# EAGLE board Project-PowerSwitch002 (EAGLE 7.3.0)

Size 60.94 x 100 mm. Coordinates in mm from the lower left corner, seen from the top.
Outline: 0,0 60.94,0 60.94,100 0,100 0,0
Copper layers (1*16): Top 0.035mm / dielectric 1.5mm / Bottom 0.035mm
Design rules "default": minimum track width 10mil, minimum drill 24mil, track to track 8mil, track to pad 8mil, pad to pad 8mil, via to via 8mil, smd to smd 8mil, copper to edge 40mil, drill to drill 8mil, minimum pad ring 10mil, minimum via ring 8mil, stop-mask expansion 4mil, vias tented up to drill 0mil, thermal gap 10mil

## Footprints (pad centres in the part's own frame; a part is rotated, then mirrored left to right if it is on the bottom)
5-5 = smd 5.08 x 5.08: P$1 0,0
PANASONIC_C = smd 2.6 x 1.4: + 2.05,0; - -2.05,0
PANASONIC_D = smd 3 x 1.4: + 2.4,0; - -2.4,0
C0603K = smd 1.05 x 1.08: 1 -0.875,0; 2 0.875,0
C0603 = smd 1.1 x 1: 1 -0.85,0; 2 0.85,0
D2PAK = smd 2.08 x 3.81: P$1 -2.54,-6.985; P$2 2.54,-6.985 | smd 11.5 x 8.89: P$3 0,4.445
SMB = smd 2.4 x 2.4: A 2.2,0; C -2.2,0
SMD-6,1X2,6 = smd 1.96 x 3.15: 1 -2.45,0; 2 2.45,0
2,8-PAD = drill 2.8 pad 5.334: B2,8 0,0
SO14W = smd 0.6 x 2.2: 1 -3.81,-4.6; 2 -2.54,-4.6; 3 -1.27,-4.6; 4 0,-4.6; 5 1.27,-4.6; 6 2.54,-4.6; 7 3.81,-4.6; 8 3.81,4.6; 9 2.54,4.6; 10 1.27,4.6; 11 0,4.6; 12 -1.27,4.6; 13 -2.54,4.6; 14 -3.81,4.6
TO220-52 = drill 1.6 pad 2.5: 1 -5.08,-30.48; 2 -2.54,-27.94; 3 0,-30.48; 4 2.54,-27.94; 5 5.08,-30.48 | hole 4.05: 0,-4
SO16 = smd 0.66 x 2.032: 1 -4.445,-3.073; 2 -3.175,-3.073; 3 -1.905,-3.073; 4 -0.635,-3.073; 5 0.635,-3.073; 6 1.905,-3.073; 7 3.175,-3.073; 8 4.445,-3.073; 9 4.445,3.073; 10 3.175,3.073; 11 1.905,3.073; 12 0.635,3.073; 13 -0.635,3.073; 14 -1.905,3.073; 15 -3.175,3.073; 16 -4.445,3.073
TO252-51 = smd 0.8 x 1.6: IN -1.14,-4.8; IS 1.14,-4.8; OUT1 -2.28,-4.8; OUT2 2.28,-4.8 | smd 5.4 x 6.2: TAB 0,2.5
JP1 = drill 0.914 long: 1 0,-1.27; 2 0,1.27
JP2 = drill 0.914 long: 1 -2.54,0; 2 0,0; 3 2.54,0
R0805 = smd 1.3 x 1.5: 1 -0.95,0; 2 0.95,0
POWER-CHOKE_WE-TPC = smd 6.3 x 2.2: 1 0,2.05; 2 0,-2.05
CHIPLED_0805 = smd 1.2 x 1.2: A 0,-1.05; C 0,1.05
HC49U-V@1 = drill 0.813: 1 -2.413,0; 2 2.413,0
M0805 = smd 1.3 x 1.6: 1 -0.95,0; 2 0.95,0
RJ10 = drill 0.9: P$1 -1.905,6.55; P$2 -0.953,9.09; P$3 0.953,6.55; P$4 1.905,9.09 | hole 1.59: -3.81,0.2; 3.81,0.2
SJ = smd 1.168 x 1.6: 1 -0.762,0; 2 0.762,0
ML6 = drill 0.914 octagon: 1 -2.54,-1.27; 2 -2.54,1.27; 3 0,-1.27; 4 0,1.27; 5 2.54,-1.27; 6 2.54,1.27
ML10 = drill 0.914 octagon: 1 -5.08,-1.27; 2 -5.08,1.27; 3 -2.54,-1.27; 4 -2.54,1.27; 5 0,-1.27; 6 0,1.27; 7 2.54,-1.27; 8 2.54,1.27; 9 5.08,-1.27; 10 5.08,1.27
SOT23 = smd 1 x 1.4: 1 -0.95,-1.1; 2 0.95,-1.1; 3 0,1.1
F/CM12P = drill 1.016 pad 2.54 octagon: + 3.81,0; - -3.81,0
SOIC127P600X175-8N = smd 1.473 x 0.559: 1 -2.718,1.905; 2 -2.718,0.635; 3 -2.718,-0.635; 4 -2.718,-1.905; 5 2.718,-1.905; 6 2.718,-0.635; 7 2.718,0.635; 8 2.718,1.905
TQFP32-08 = smd 1.27 x 0.559: 1 -4.293,2.8; 2 -4.293,2; 3 -4.293,1.2; 4 -4.293,0.4; 5 -4.293,-0.4; 6 -4.293,-1.2; 7 -4.293,-2; 8 -4.293,-2.8; 17 4.293,-2.8; 18 4.293,-2; 19 4.293,-1.2; 20 4.293,-0.4; 21 4.293,0.4; 22 4.293,1.2; 23 4.293,2; 24 4.293,2.8 | smd 0.559 x 1.27: 9 -2.8,-4.293; 10 -2,-4.293; 11 -1.2,-4.293; 12 -0.4,-4.293; 13 0.4,-4.293; 14 1.2,-4.293; 15 2,-4.293; 16 2.8,-4.293; 25 2.8,4.293; 26 2,4.293; 27 1.2,4.293; 28 0.4,4.293; 29 -0.4,4.293; 30 -1.2,4.293; 31 -2,4.293; 32 -2.8,4.293

## Placement (x,y rotation side)
12IN+  WIREPADSMD5-5  [5-5]  57.15,69.85 0 top
12IN-  WIREPADSMD5-5  [5-5]  57.15,76.2 0 top
12OUT+  WIREPADSMD5-5  [5-5]  57.15,38.1 0 top
12OUT-  WIREPADSMD5-5  [5-5]  -58.42,64.77 0 top  (outside the outline)
24IN+  WIREPADSMD5-5  [5-5]  57.15,82.55 0 top
24IN-  WIREPADSMD5-5  [5-5]  57.15,88.9 0 top
ACTU+  WIREPADSMD5-5  [5-5]  57.15,44.45 0 top
ACTU-  WIREPADSMD5-5  [5-5]  57.15,63.5 0 top
C3  VF 22/35 P-C  [PANASONIC_C]  -102.87,53.34 0 top  (outside the outline)
C4  VF 220/16 K-D8  [PANASONIC_D]  -88.9,82.55 0 top  (outside the outline)
C5  100n  [C0603K]  -22.86,123.19 0 top  (outside the outline)
C10  22p  [C0603K]  -72.39,123.19 0 top  (outside the outline)
C11  22p  [C0603K]  -76.2,123.19 0 top  (outside the outline)
C12  100n  [C0603K]  -27.94,123.19 0 top  (outside the outline)
C13  100n  [C0603K]  -33.02,123.19 0 top  (outside the outline)
C14  100n  [C0603K]  -38.1,123.19 0 top  (outside the outline)
C16  100n  [C0603K]  -43.18,123.19 0 top  (outside the outline)
C18  100n  [C0603K]  -48.26,123.19 0 top  (outside the outline)
C19  100n  [C0603K]  -53.34,123.19 0 top  (outside the outline)
C20  100n  [C0603K]  -58.42,123.19 0 top  (outside the outline)
C21  100n  [C0603K]  -63.5,123.19 0 top  (outside the outline)
C24  100n  [C0603]  -17.78,123.19 0 top  (outside the outline)
C25  100n  [C0603K]  -68.58,123.19 0 top  (outside the outline)
D1  SFS1602G  [D2PAK]  -59.69,10.16 0 top  (outside the outline)
D3  MBRS140  [SMB]  -50.8,64.77 0 top  (outside the outline)
EXT+  WIREPADSMD5-5  [5-5]  48.26,38.1 0 top
EXT-  WIREPADSMD5-5  [5-5]  -96.52,90.17 0 top  (outside the outline)
F2-0.5A  SMD-MICRO-FUSE  [SMD-6,1X2,6]  -78.74,64.77 0 top  (outside the outline)
H5  MOUNT-PAD-ROUND2.8  [2,8-PAD]  -16.51,82.55 0 top  (outside the outline)
H6  MOUNT-PAD-ROUND2.8  [2,8-PAD]  -24.13,82.55 0 top  (outside the outline)
H7  MOUNT-PAD-ROUND2.8  [2,8-PAD]  -31.75,82.55 0 top  (outside the outline)
H8  MOUNT-PAD-ROUND2.8  [2,8-PAD]  -39.37,82.55 0 top  (outside the outline)
IC3  LM2574M-5.0  [SO14W]  -45.72,54.61 0 top  (outside the outline)
IC4  BTS555E3146  [TO220-52]  52.07,33.02 0 top
IC7  MAX202  [SO16]  -19.05,66.04 0 top  (outside the outline)
IC10  BTS6133  [TO252-51]  -88.9,6.35 0 top  (outside the outline)
IC11  BTS6133  [TO252-51]  -99.06,6.35 0 top  (outside the outline)
IC12  BTS6133  [TO252-51]  -109.22,6.35 0 top  (outside the outline)
IC15  BTS6133  [TO252-51]  -19.05,40.64 0 top  (outside the outline)
JP1  JP_CAN  [JP1]  -40.64,64.77 0 top  (outside the outline)
JP2  [JP2]  -97.79,82.55 0 top  (outside the outline)
JP3  [JP2]  -106.68,82.55 0 top  (outside the outline)
JP4  [JP2]  -17.78,90.17 0 top  (outside the outline)
JP5  [JP2]  -26.67,90.17 0 top  (outside the outline)
JP6  [JP2]  -35.56,90.17 0 top  (outside the outline)
JP7  [JP2]  -44.45,90.17 0 top  (outside the outline)
JP9  [JP1]  -74.93,116.84 0 top  (outside the outline)
KICK+  WIREPADSMD5-5  [5-5]  -105.41,90.17 0 top  (outside the outline)
KICK-  WIREPADSMD5-5  [5-5]  57.15,95.25 0 top
L1  10µH  [R0805]  -67.31,104.14 0 top  (outside the outline)
L3  WE-TPC 2811 10uH  [POWER-CHOKE_WE-TPC]  -33.02,54.61 0 top  (outside the outline)
LED1  [CHIPLED_0805]  -80.01,115.57 0 top  (outside the outline)
LED2  [CHIPLED_0805]  -85.09,115.57 0 top  (outside the outline)
LED3  [CHIPLED_0805]  -90.17,115.57 0 top  (outside the outline)
LED4  [CHIPLED_0805]  -95.25,115.57 0 top  (outside the outline)
LED5  [CHIPLED_0805]  -100.33,115.57 0 top  (outside the outline)
LED6  [CHIPLED_0805]  -105.41,115.57 0 top  (outside the outline)
MOT1+  WIREPADSMD5-5  [5-5]  -96.52,73.66 0 top  (outside the outline)
MOT1-  WIREPADSMD5-5  [5-5]  57.15,50.8 0 top
MOT2+  WIREPADSMD5-5  [5-5]  -105.41,73.66 0 top  (outside the outline)
MOT2-  WIREPADSMD5-5  [5-5]  57.15,57.15 0 top
Q1  16Mhz  [HC49U-V@1]  -90.17,53.34 0 top  (outside the outline)
R1  10k  [R0805]  -44.45,116.84 0 top  (outside the outline)
R2  20k  [R0805]  -49.53,116.84 0 top  (outside the outline)
R3  100k  [R0805]  -73.66,104.14 0 top  (outside the outline)
R4  150  [R0805]  -34.29,116.84 0 top  (outside the outline)
R5  4k7  [R0805]  -54.61,116.84 0 top  (outside the outline)
R6  120  [M0805]  -69.85,116.84 0 top  (outside the outline)
R7  150  [R0805]  -39.37,116.84 0 top  (outside the outline)
R8  20k  [R0805]  -59.69,116.84 0 top  (outside the outline)
R9  20k  [R0805]  -64.77,116.84 0 top  (outside the outline)
R10  100k  [R0805]  -80.01,104.14 0 top  (outside the outline)
R11  100k  [R0805]  -86.36,104.14 0 top  (outside the outline)
R12  150  [R0805]  -92.71,104.14 0 top  (outside the outline)
R13  1k  [R0805]  -99.06,104.14 0 top  (outside the outline)
R14  1k  [R0805]  -105.41,104.14 0 top  (outside the outline)
R15  10k  [R0805]  -111.76,104.14 0 top  (outside the outline)
R16  10k  [R0805]  -16.51,110.49 0 top  (outside the outline)
R17  10k  [R0805]  -22.86,110.49 0 top  (outside the outline)
R18  150  [R0805]  -29.21,110.49 0 top  (outside the outline)
R19  1k  [R0805]  -35.56,110.49 0 top  (outside the outline)
R20  1k  [R0805]  -41.91,110.49 0 top  (outside the outline)
R21  1k  [R0805]  -48.26,110.49 0 top  (outside the outline)
R22  10k  [R0805]  -54.61,110.49 0 top  (outside the outline)
R23  10k  [R0805]  -60.96,110.49 0 top  (outside the outline)
R24  150  [R0805]  69.85,97.79 0 top  (outside the outline)
R25  150  [R0805]  -73.66,110.49 0 top  (outside the outline)
R26  150  [R0805]  -80.01,110.49 0 top  (outside the outline)
R27  150  [R0805]  -86.36,110.49 0 top  (outside the outline)
R28  560  [R0805]  -92.71,110.49 0 top  (outside the outline)
R29  150  [R0805]  -99.06,110.49 0 top  (outside the outline)
R30  100k 0.1%  [R0805]  -30.48,97.79 0 top  (outside the outline)
R31  1k  [R0805]  -105.41,110.49 0 top  (outside the outline)
R35  220k 0.1%  [R0805]  -41.91,97.79 0 top  (outside the outline)
R36  30k 0.1%  [R0805]  -109.22,97.79 0 top  (outside the outline)
R37  300k 0.1%  [R0805]  -53.34,97.79 0 top  (outside the outline)
R38  30k 0.1%  [R0805]  -20.32,104.14 0 top  (outside the outline)
R39  300k 0.1%  [R0805]  -64.77,97.79 0 top  (outside the outline)
R40  30k 0.1%  [R0805]  -30.48,104.14 0 top  (outside the outline)
R41  300k 0.1%  [R0805]  -76.2,97.79 0 top  (outside the outline)
R42  20k 0.1%  [R0805]  -40.64,104.14 0 top  (outside the outline)
R43  20k 0.1%  [R0805]  -50.8,104.14 0 top  (outside the outline)
R44  20k 0.1%  [R0805]  -60.96,104.14 0 top  (outside the outline)
R45  910k 0.1%  [R0805]  -87.63,97.79 0 top  (outside the outline)
R46  240k 0.1%  [R0805]  -99.06,97.79 0 top  (outside the outline)
R47  10k  [R0805]  -111.76,110.49 0 top  (outside the outline)
R48  10k  [R0805]  -16.51,116.84 0 top  (outside the outline)
R49  10k  [R0805]  -22.86,116.84 0 top  (outside the outline)
R50  10k  [R0805]  -29.21,116.84 0 top  (outside the outline)
RJ_1  RJ10  [RJ10]  35.56,12.7 0 top
RJ_2  RJ10  [RJ10]  24.13,12.7 0 top
SJ2  [SJ]  -80.01,121.92 0 top  (outside the outline)
SV1  [ML6]  8.89,21.59 0 top
SV2  SchalterBox  [ML10]  30.48,39.37 0 top
SV3  ISP  [ML6]  8.89,33.02 0 top
SV4  extraSchalter  [ML10]  30.48,29.21 0 top
T1  BC847  [SOT23]  -59.69,74.93 0 top  (outside the outline)
T2  BC849  [SOT23]  -67.31,74.93 0 top  (outside the outline)
T5  BC849  [SOT23]  -74.93,74.93 0 top  (outside the outline)
T6  BC849  [SOT23]  -82.55,74.93 0 top  (outside the outline)
T7  BC849  [SOT23]  -90.17,74.93 0 top  (outside the outline)
TDB-05  F/CM12P  [F/CM12P]  8.89,8.89 0 top
U$1  MCP2551-I/SN  [SOIC127P600X175-8N]  -67.31,54.61 0 top  (outside the outline)
U$2  ATMEGA64M1  [TQFP32-08]  29.21,67.31 0 top
VR6  TL431_SOT23  [SOT23]  -93.98,64.77 0 top  (outside the outline)
VR7  TL431_SOT23  [SOT23]  -107.95,64.77 0 top  (outside the outline)
VR8  TL431_SOT23  [SOT23]  -24.13,74.93 0 top  (outside the outline)
VR9  TL431_SOT23  [SOT23]  -38.1,74.93 0 top  (outside the outline)
VR10  TL431_SOT23  [SOT23]  -52.07,74.93 0 top  (outside the outline)

## Library data of the parts
12IN+ 12IN- 12OUT+ 12OUT- 24IN+ 24IN- ACTU+ ACTU- EXT+ EXT- KICK+ KICK- MOT1+ MOT1- MOT2+ MOT2- = mywirepad
C3-C5 C10-C14 C16 C18-C21 C24 C25 L3 R1-R31 R35-R50 = rcl
D1 RJ_1 RJ_2 = ownParts
D3 = diode
F2-0.5A = f-lf-omniblok-s
H5-H8 = holes
IC3 = linear
IC4 = infineon; OC_FARNELL: unknown; OC_NEWARK: unknown
IC7 = maxim; MPN: MAX3232CSE; OC_FARNELL: 9725490; OC_NEWARK: 90C2890
IC10-IC12 IC15 = BTS443P
JP1-JP7 JP9 SJ2 = jumper
L1 = myrcl
LED1-LED6 = led
Q1 = crystal
SV1-SV4 = con-ml; OC_FARNELL: unknown; OC_NEWARK: unknown
T1 T2 T5-T7 = transistor
TDB-05 = buzzer; OC_FARNELL: unknown; OC_NEWARK: unknown
U$1 = Microchip-MCP2551-I_SN; MPN: MCP2551-I/SN; OC_FARNELL: 9758569; OC_NEWARK: 69K7604; PACKAGE: SOIC-8; SUPPLIER: Microchip
U$2 = atmega16m1-32m1-64m1
VR6-VR10 = 1_USER

## Nets
12V: D1.P$2 IC10.OUT1 IC10.OUT2
12VIN: 12IN+.P$1 IC10.TAB R3.1 R28.1 R35.2
12VOUT: 12OUT+.P$1 D1.P$3 F2-0.5A.1 R16.1
24VIN: 24IN+.P$1 IC4.3 IC11.TAB IC12.TAB R11.2 R37.2 R39.2 R41.2
+5V: C4.+ C5.2 C12.2 C24.2 C25.1 IC3.3 IC7.16 L1.2 L3.2 R1.2 R18.2 SJ2.1 SV2.9 SV2.10 SV3.2 SV4.9 SV4.10 T2.3 T5.3 T6.3 T7.3 TDB-05.+ U$1.3 U$2.4
ADC2: R9.2 R11.1 U$2.13
ADC3: IC10.IS R13.2 U$2.14
ADC5: IC12.IS R14.2 U$2.16
ADC6: IC4.4 R20.2 U$2.26
ADC7: IC15.IS R21.2 U$2.27
ADC8: R2.2 R3.2 U$2.17
ADC9: R8.2 R10.2 U$2.18
ADC10: IC11.IS R19.2 U$2.22
AKTUATOR: ACTU+.P$1 IC11.OUT1 IC11.OUT2 R17.1
CANH: R6.1 RJ_1.P$3 RJ_2.P$3 U$1.7
CANL: JP1.2 RJ_1.P$2 RJ_2.P$2 U$1.6
CS: U$2.32
EXT: D1.P$1 IC15.OUT1 IC15.OUT2
EXTIN: EXT+.P$1 IC15.TAB R10.1 R45.2
GND: 12IN-.P$1 12OUT-.P$1 24IN-.P$1 ACTU-.P$1 C3.- C4.- C5.1 C10.1 C11.1 C12.1 C13.1 C14.1 C16.2 C20.2 C21.2 C24.1 C25.2 D3.A EXT-.P$1 H5.B2,8 H6.B2,8 H7.B2,8 H8.B2,8 IC3.4 IC3.5 IC3.6 IC7.8 IC7.11 IC7.15 JP2.3 JP3.3 JP4.3 JP5.3 KICK-.P$1 LED1.C LED2.C LED3.C LED4.C LED5.C LED6.C MOT1-.P$1 MOT2-.P$1 R2.1 R8.1 R9.1 R13.1 R14.1 R19.1 R20.1 R21.1 R30.1 R31.1 R42.1 R43.1 R44.1 R46.1 RJ_1.P$4 RJ_2.P$4 SV1.5 SV2.1 SV2.2 SV3.6 SV4.1 SV4.2 T1.2 U$1.2 U$2.5 U$2.20 VR10.3
ICLED_AKT: R4.1 R25.1 T6.2 U$2.30
ICLED_GRUEN: R12.1 R27.1 T7.2 U$2.28
ICLED_KICK: R24.1 R29.1 T2.2 U$2.24
ICLED_ROT: R7.1 R26.1 T5.2 U$2.23
KICKER: IC12.OUT1 IC12.OUT2 KICK+.P$1 R23.1
LED_1: SV4.5
LED_2: SV4.3
LED_GELB: R4.2 SV2.5
LED_GRUEN: R12.2 SV2.7
LED_KICK: R24.2 SV4.7
LED_ROT: R7.2 SV2.3
MISO: SV3.1 U$2.1
MOSI: JP7.1 SV3.4
MOTION: IC4.1 IC4.5 MOT1+.P$1 MOT2+.P$1 R15.1
N$1: R5.2 T1.1
N$2: RJ_1.P$1 RJ_2.P$1 SJ2.2
N$3: IC15.IN R22.2
N$4: R23.2 T2.1
N$5: LED6.A R29.2
N$6: R31.2 U$1.8
N$7: JP1.1 R6.2
N$8: LED1.A R25.2
N$9: LED2.A R26.2
N$10: C10.2 Q1.2 U$2.11
N$11: C11.2 Q1.1 U$2.10
N$12: JP2.2 VR7.3
N$13: C14.2 U$2.21
N$14: C16.1 L1.1 U$2.19
N$15: C18.2 IC7.1
N$16: JP6.2 U$2.12
N$17: JP7.2 U$2.2
N$18: C19.2 IC7.4
N$19: JP4.2 VR9.3
N$20: T1.3 TDB-05.-
N$21: LED3.A R27.2
N$22: C3.+ F2-0.5A.2 IC3.10
N$23: JP3.2 VR8.3
N$24: LED4.A R28.2
N$25: JP5.2 R22.1 VR6.3
N$28: IC10.IN R50.2
N$33: R30.2 R35.1 VR6.2 VR10.1
N$35: C18.1 IC7.3
N$36: C19.1 IC7.5
N$37: C20.1 IC7.2
N$38: C21.1 IC7.6
N$39: R49.1 VR7.1
N$40: IC7.13 SV1.3
N$41: IC7.7 SV1.1
N$42: R36.2 R37.1 VR7.2
N$43: IC12.IN R47.2
N$44: R38.2 R39.1 VR8.2
N$45: R40.2 R41.1 VR9.2
N$46: IC4.2 R48.2
N$47: R38.1 R42.2
N$48: R40.1 R43.2
N$49: R36.1 R44.2
N$50: R45.1 R46.2 VR10.2
N$51: R47.1 VR8.1
N$52: R48.1 VR9.1
N$53: IC11.IN R49.2
N$54: R50.1 VR6.1
N$64: D3.C IC3.12 L3.1
N$102: R16.2 T5.1
N$104: R17.2 T6.1
N$106: R15.2 T7.1
N$108: LED5.A R18.1
RESET: SV3.5
RST: C13.2 R1.1 U$2.31
RXCAN: U$1.4 U$2.7
RXD: IC7.12 JP6.3
SCK: JP6.1 SV3.3
SPEAKER: R5.1 U$2.29
SW_1: SV4.6 U$2.3
SW_2: SV4.4
SW_12V: JP5.1 SV2.4
SW_AKT: JP2.1 JP9.2 SV2.6 U$2.8
SW_KICK: JP3.1 JP9.1 SV4.8 U$2.25
SW_MOT: JP4.1 SV2.8 U$2.9
TXCAN: U$1.1 U$2.6
TXD: IC7.10 JP7.3

## Tracks (layer width: path | path; a pad name or v marks a point on that pad's centre or on a via)
12V  (2 unrouted)
12VIN  (4 unrouted)
12VOUT  (3 unrouted)
24VIN  (7 unrouted)
+5V  (23 unrouted)
ADC2  (2 unrouted)
ADC3  (2 unrouted)
ADC5  (2 unrouted)
ADC6  (2 unrouted)
ADC7  (2 unrouted)
ADC8  (2 unrouted)
ADC9  (2 unrouted)
ADC10  (2 unrouted)
AKTUATOR  (3 unrouted)
CANH  (3 unrouted)
CANL  (3 unrouted)
EXT  (2 unrouted)
EXTIN  (3 unrouted)
GND  (68 unrouted)
ICLED_AKT  (3 unrouted)
ICLED_GRUEN  (3 unrouted)
ICLED_KICK  (3 unrouted)
ICLED_ROT  (3 unrouted)
KICKER  (3 unrouted)
LED_GELB  (1 unrouted)
LED_GRUEN  (1 unrouted)
LED_KICK  (1 unrouted)
LED_ROT  (1 unrouted)
MISO  (1 unrouted)
MOSI  (1 unrouted)
MOTION  (4 unrouted)
N$1  (1 unrouted)
N$2  (2 unrouted)
N$3  (1 unrouted)
N$4  (1 unrouted)
N$5  (1 unrouted)
N$6  (1 unrouted)
N$7  (1 unrouted)
N$8  (1 unrouted)
N$9  (1 unrouted)
N$10  (2 unrouted)
N$11  (2 unrouted)
N$12  (1 unrouted)
N$13  (1 unrouted)
N$14  (2 unrouted)
N$15  (1 unrouted)
N$16  (1 unrouted)
N$17  (1 unrouted)
N$18  (1 unrouted)
N$19  (1 unrouted)
N$20  (1 unrouted)
N$21  (1 unrouted)
N$22  (2 unrouted)
N$23  (1 unrouted)
N$24  (1 unrouted)
N$25  (2 unrouted)
N$28  (1 unrouted)
N$33  (3 unrouted)
N$35  (1 unrouted)
N$36  (1 unrouted)
N$37  (1 unrouted)
N$38  (1 unrouted)
N$39  (1 unrouted)
N$40  (1 unrouted)
N$41  (1 unrouted)
N$42  (2 unrouted)
N$43  (1 unrouted)
N$44  (2 unrouted)
N$45  (2 unrouted)
N$46  (1 unrouted)
N$47  (1 unrouted)
N$48  (1 unrouted)
N$49  (1 unrouted)
N$50  (2 unrouted)
N$51  (1 unrouted)
N$52  (1 unrouted)
N$53  (1 unrouted)
N$54  (1 unrouted)
N$64  (2 unrouted)
N$102  (1 unrouted)
N$104  (1 unrouted)
N$106  (1 unrouted)
N$108  (1 unrouted)
RST  (2 unrouted)
RXCAN  (1 unrouted)
RXD  (1 unrouted)
SCK  (1 unrouted)
SPEAKER  (1 unrouted)
SW_1  (1 unrouted)
SW_12V  (1 unrouted)
SW_AKT  (3 unrouted)
SW_KICK  (3 unrouted)
SW_MOT  (2 unrouted)
TXCAN  (1 unrouted)
TXD  (1 unrouted)
(copper drawn outside any net)
  shapes: Top area x2